# Altium PCB board_2.PcbDoc
Units mm, origin at the board's own origin, x right, y up, seen from the top; angles counter-clockwise.
Board outline 90 x 50 mm, 4 copper layers (Top Layer, Signal Layer 1, Signal Layer 2, Bottom Layer), stack 0.778 mm thick; 158 components, 168 nets, 632 pads, 0 vias.
Unrouted connection lines stored in the file: 312.
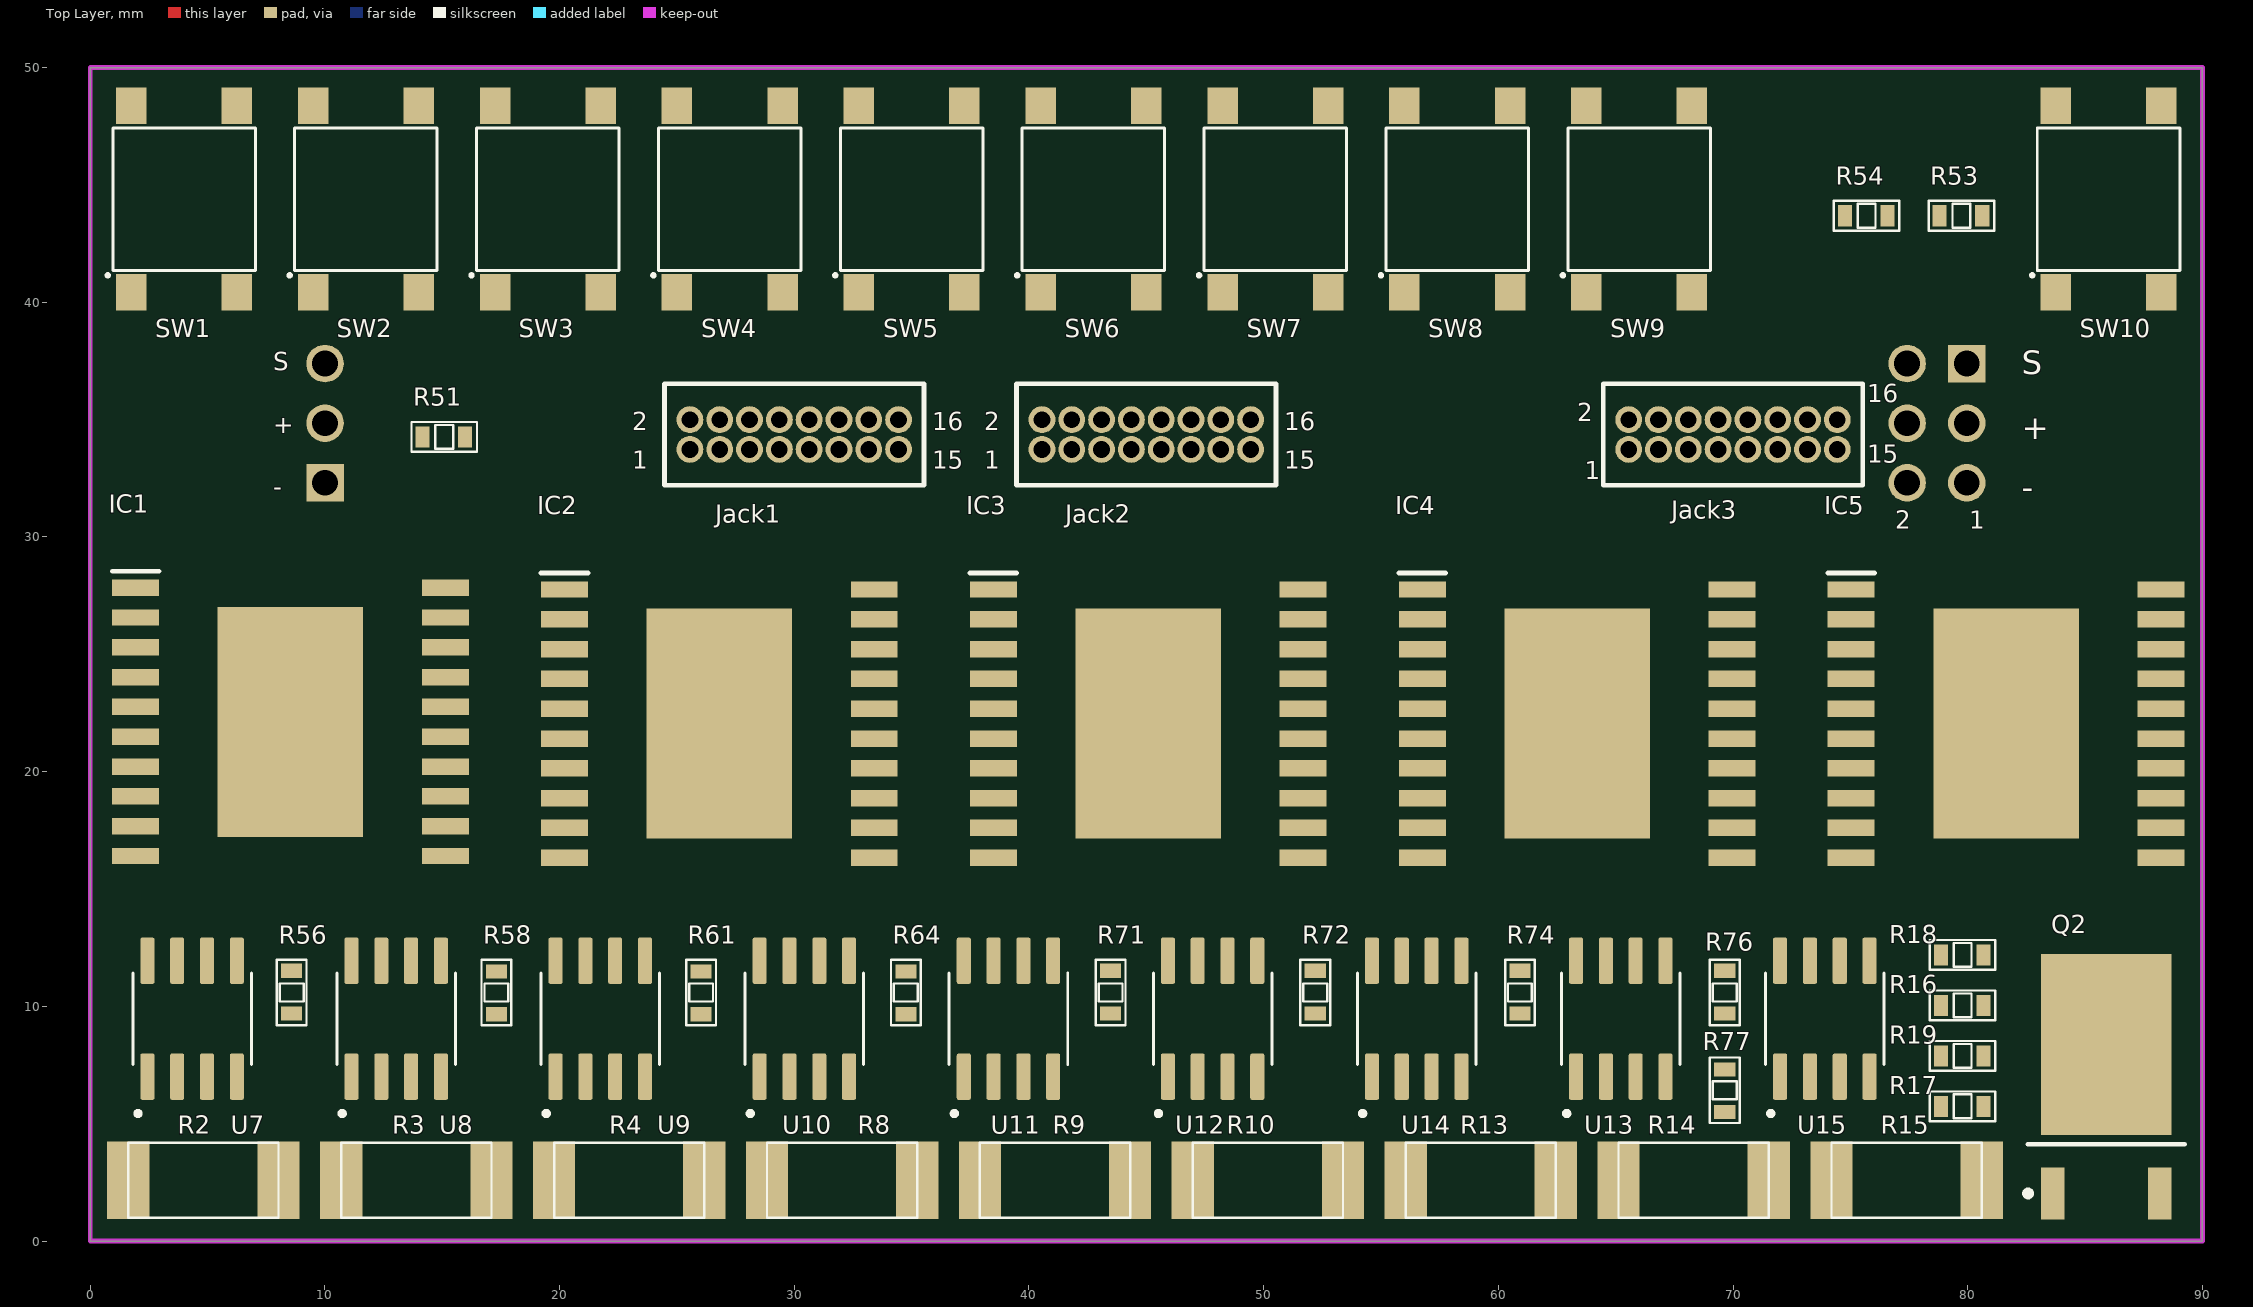
[diagram p0: Top Layer view]
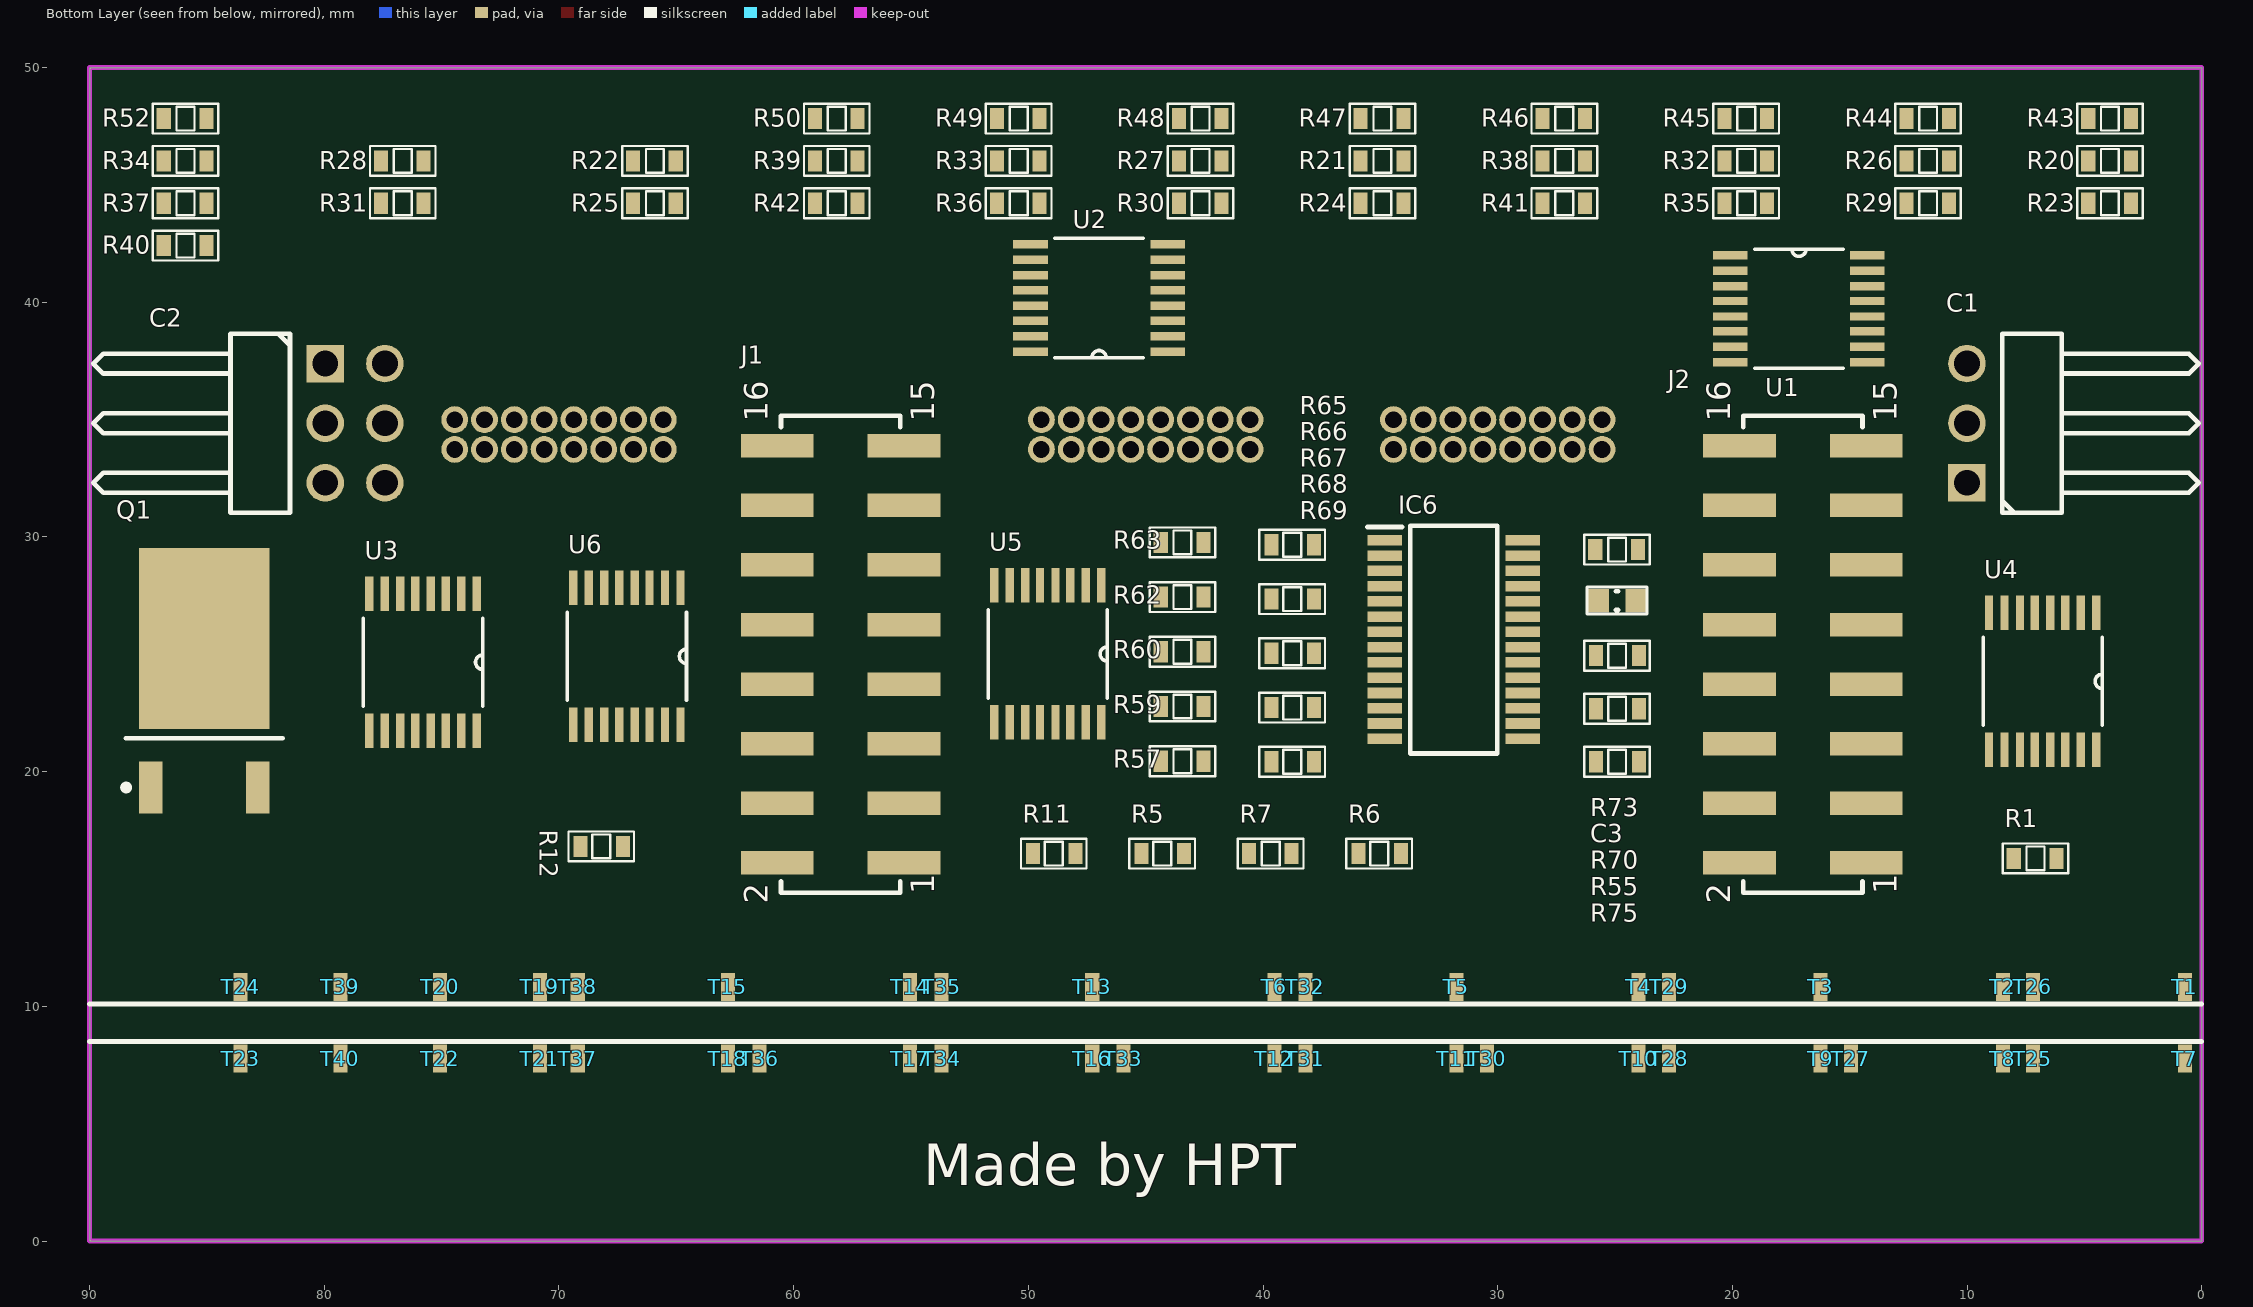
[diagram p1: Bottom Layer view, seen from below]
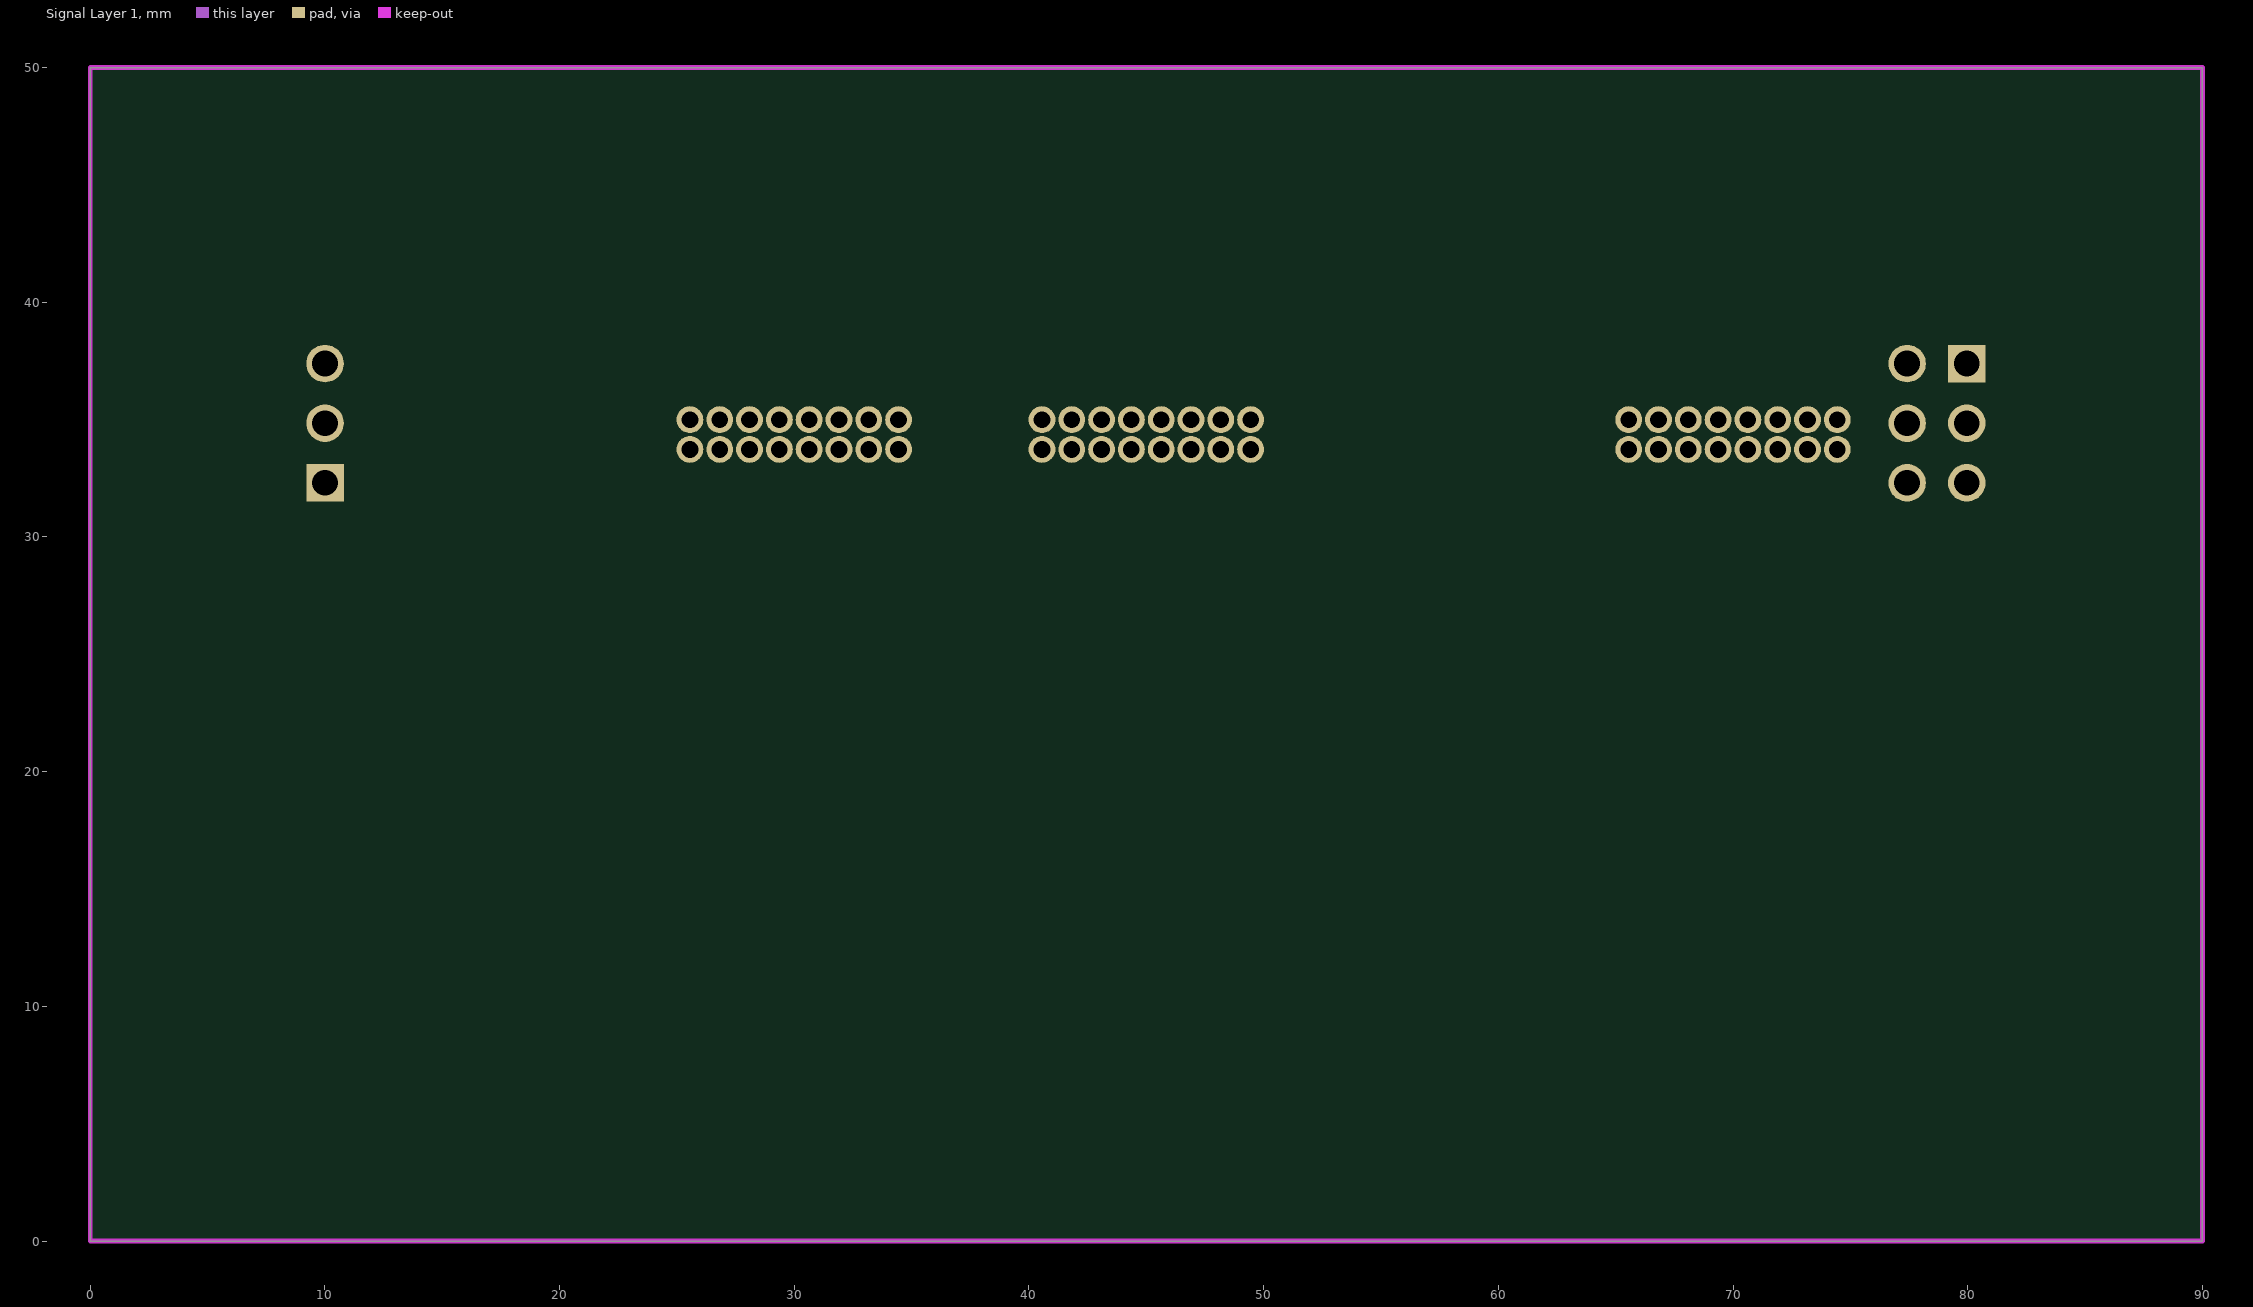
[diagram p2: Signal Layer 1]
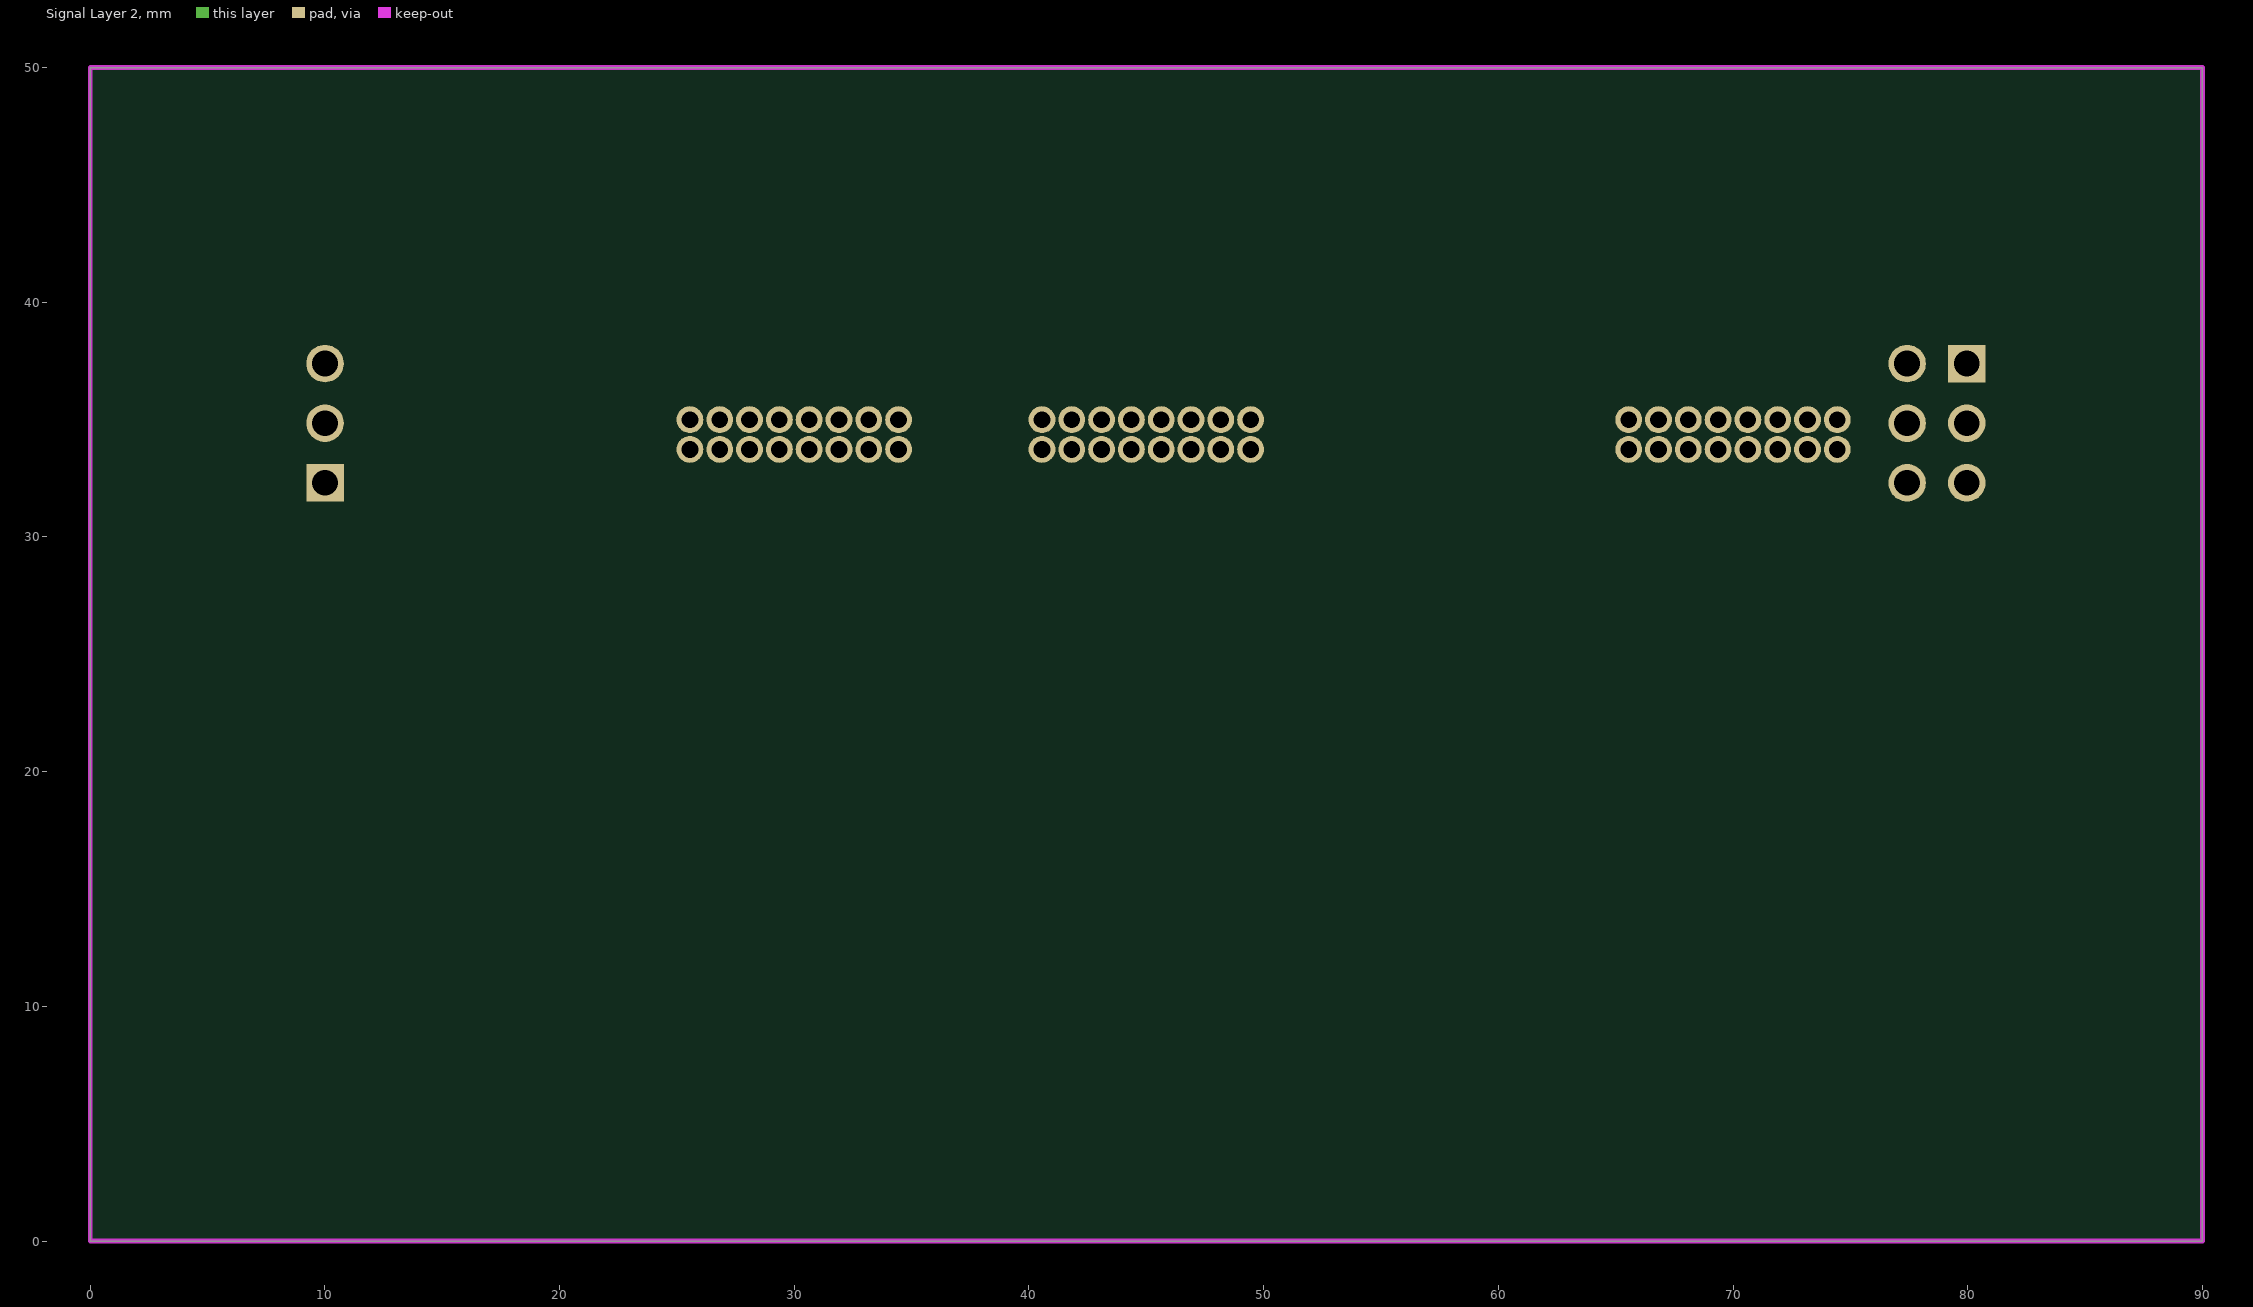
[diagram p3: Signal Layer 2]

## Layer stack, top to bottom
Top Solder: solder mask 0.0102, Solder Resist, Dk 3.5
Top Layer: signal copper 0.0356
Dielectric 1: core 0.254, FR-4, Dk 4.2
Signal Layer 1: signal copper 0.036
Dielectric 3: prepreg 0.127, Dk 4.2
Signal Layer 2: signal copper 0.036
Dielectric 2: core 0.254, Dk 4.2
Bottom Layer: signal copper 0.0356
Bottom Solder: solder mask 0.0102, Solder Resist, Dk 3.5

## Board outline
0,0 90,0 90,50 0,50

## Design rules (kind name [scope] priority, off if disabled: settings)
Clearance [All] p1: gap=0.127
PlaneConnect [All] p1: planeconnectstyle=Direct reliefexpansion=0.508 reliefentries=4 reliefconductorwidth=0.254 reliefairgap=0.254
PolygonConnect [All] p1: connectstyle=Direct reliefconductorwidth=0.254 reliefentries=4 polygonreliefangle="90 Angle" airgapwidth=0.254
RoomDefinition servo [InComponentClass('servo')] p1: confinementstyle=ConfineIn formatcopy=TRUE lockcomponents=FALSE outline 111.76,-15.418 315.874,-15.418 315.874,-2.261 111.76,-2.261
RoomDefinition user [InComponentClass('user')] p2: confinementstyle=ConfineIn formatcopy=TRUE lockcomponents=FALSE outline 111.963,30.175 501.193,30.175 501.193,55.423 111.963,55.423
RoomDefinition ina219 [InComponentClass('ina219')] p3: confinementstyle=ConfineIn formatcopy=TRUE lockcomponents=FALSE outline 111.963,9.55 505.13,9.55 505.13,28.905 111.963,28.905
RoomDefinition 74hc595 [InComponentClass('74hc595')] p4: confinementstyle=ConfineIn formatcopy=TRUE lockcomponents=FALSE outline 111.963,0.254 163.678,0.254 163.678,8.28 111.963,8.28
RoutingVias [All] p1: holewidth=0.3 width=0.5 viastyle="Through Hole" minholewidth=0.3 minwidth=0.5 maxholewidth=0.711 maxwidth=1.27
SolderMaskExpansion [All] p1: expansion=0.102
Width [All] p1: maxlimit=2.54 minlimit=0.203 preferedwidth=0.203
29 further rules are at their usual default settings.

## Classes and differential pairs
component class servo: C3 IC6 R55 R56 R57 R58 R59 R60 R61 R62 R63 R64 R65 R66 R67 R68 R69 R70 R71 R72 R73 R74 R75 R76 R77 T25 T26 T27 T28 T29 T30 T31 T32 T33 T34 T35 T36 T40
component class user: C1 C2 J1 J2 Jack1 Jack2 Jack3 R20 R21 R22 R23 R24 R25 R26 R27 R28 R29 R30 R31 R32 R33 R34 R35 R36 R37 R38 R39 R40 R41 R42 R43 R44 R45 R46 R47 R48 R49 R50 R51 R52 R53 R54 SW1 SW2 SW3 SW4 SW5 SW6 SW7 SW8 SW9 SW10 T23 T24
component class ina219: IC1 IC2 IC3 IC4 IC5 Q1 Q2 R1 R2 R3 R4 R5 R6 R7 R8 R9 R10 R11 R12 R13 R14 R15 R16 R17 R18 R19 T1 T2 T3 T4 T5 T6 T7 T8 T9 T10 T11 T12 T13 T14 T15 T16 T17 T18 T19 T20 T21 T22 U7 U8 U9 U10 U11 U12 U13 U14 U15
component class 74hc595: U1 U2 U3 U4 U5 U6 U27

## Components (designator, comment, footprint, x,y, rotation, side; value= is the part's Value field where it differs from the comment)
C1 "JP3" JP3-D1C 7.468,38.659 r90 bottom
C2 "JP3x2" JP3-D2C 78.689,34.849 r270 bottom
C3 "0.1uF" CN-SMD-0603 24.917,27.293 r0 bottom
IC1 "L298P" SOIC127P1420X360-21N 8.534,22.123 r0 top
IC2 "L298P" SOIC127P1420X360-21N 26.81,22.047 r0 top
IC3 "L298P" SOIC127P1420X360-21N 45.085,22.047 r0 top
IC4 "L298P" SOIC127P1420X360-21N 63.36,22.047 r0 top
IC5 "L298P" SOIC127P1420X360-21N 81.636,22.047 r0 top
IC6 "PCA9685PW,112" SOP65P640X110-28N 31.877,25.629 r180 bottom
J1 "2.54 mm_SMD_Vertical_16 pin" 61031621121 58,25 r90 bottom
J2 "2.54 mm_SMD_Vertical_16 pin" 61031621121 17,25 r90 bottom
Jack1 "SAMTEC-FTS-108-04-X-D" SAMTEC-FTS-108-04-X-D 30,34.366 r0 top
Jack2 "SAMTEC-FTS-108-04-X-D" SAMTEC-FTS-108-04-X-D 45,34.366 r0 top
Jack3 "SAMTEC-FTS-108-04-X-D" SAMTEC-FTS-108-04-X-D 70,34.366 r0 top
Q1 "IRFR3708" TO-252AA_M 85.115,23.876 r90 bottom
Q2 "IRFR3708" TO-252AA_M 85.903,6.579 r90 top
R1 "Res" RES-SMD-0603 7.087,16.307 r0 bottom
R2 "0.01R" RES-SMD-2512 4.826,2.464 r0 top
R3 "0.01R" RES-SMD-2512 13.897,2.464 r0 top
R4 "0.01R" RES-SMD-2512 22.968,2.718 r180 top
R5 "Res" RES-SMD-0603 44.298,16.51 r180 bottom
R6 "Res" RES-SMD-0603 35.052,16.51 r180 bottom
R7 "Res" RES-SMD-0603 39.675,16.51 r0 bottom
R8 "0.01R" RES-SMD-2512 32.039,2.464 r0 top
R9 "0.01R" RES-SMD-2512 41.11,2.464 r0 top
R10 "0.01R" RES-SMD-2512 50.181,2.464 r0 top
R11 "Res" RES-SMD-0603 48.92,16.51 r180 bottom
R12 "Res" RES-SMD-0603 68.199,16.815 r180 bottom
R13 "0.01R" RES-SMD-2512 59.252,2.464 r0 top
R14 "0.01R" RES-SMD-2512 68.323,2.464 r0 top
R15 "0.01R" RES-SMD-2512 77.394,2.464 r0 top
R16 "1k" RES-SMD-0603 79.781,10.041 r180 top
R17 "1K" RES-SMD-0603 79.781,5.74 r180 top
R18 "10K" RES-SMD-0603 79.781,12.192 r180 top
R19 "10K" RES-SMD-0603 79.781,7.891 r180 top
R20 "1K" RES-SMD-0603 3.914,46.025 r0 bottom
R21 "1K" RES-SMD-0603 34.914,46.025 r0 bottom
R22 "1K" RES-SMD-0603 65.914,46.025 r0 bottom
R23 "1K" RES-SMD-0603 3.914,44.221 r0 bottom
R24 "1K" RES-SMD-0603 34.914,44.221 r0 bottom
R25 "1K" RES-SMD-0603 65.914,44.221 r0 bottom
R26 "1K" RES-SMD-0603 11.664,46.025 r0 bottom
R27 "1K" RES-SMD-0603 42.664,46.025 r0 bottom
R28 "1K" RES-SMD-0603 76.657,46.025 r0 bottom
R29 "1K" RES-SMD-0603 11.664,44.221 r0 bottom
R30 "1K" RES-SMD-0603 42.664,44.221 r0 bottom
R31 "1K" RES-SMD-0603 76.657,44.221 r0 bottom
R32 "1K" RES-SMD-0603 19.414,46.025 r0 bottom
R33 "1K" RES-SMD-0603 50.414,46.025 r0 bottom
R34 "1K" RES-SMD-0603 85.914,46.025 r0 bottom
R35 "1K" RES-SMD-0603 19.414,44.221 r0 bottom
R36 "1K" RES-SMD-0603 50.414,44.221 r0 bottom
R37 "1K" RES-SMD-0603 85.914,44.221 r0 bottom
R38 "1K" RES-SMD-0603 27.164,46.025 r0 bottom
R39 "1K" RES-SMD-0603 58.164,46.025 r0 bottom
R40 "1K" RES-SMD-0603 85.914,42.418 r0 bottom
R41 "1K" RES-SMD-0603 27.164,44.221 r0 bottom
R42 "1K" RES-SMD-0603 58.164,44.221 r0 bottom
R43 "10K" RES-SMD-0603 3.914,47.828 r0 bottom
R44 "10K" RES-SMD-0603 11.664,47.828 r0 bottom
R45 "10K" RES-SMD-0603 19.414,47.828 r0 bottom
R46 "10K" RES-SMD-0603 27.164,47.828 r0 bottom
R47 "10K" RES-SMD-0603 34.914,47.828 r0 bottom
R48 "10K" RES-SMD-0603 42.664,47.828 r0 bottom
R49 "10K" RES-SMD-0603 50.414,47.828 r0 bottom
R50 "10K" RES-SMD-0603 58.164,47.828 r0 bottom
R51 "0R" RES-SMD-0603 15.088,34.265 r180 top
R52 "10K" RES-SMD-0603 85.914,47.828 r0 bottom
R53 "0R" RES-SMD-0603 79.731,43.688 r180 top
R54 "0R" RES-SMD-0603 75.692,43.688 r180 top
R55 "220" RES-SMD-0603 24.917,22.682 r180 bottom
R56 "220" RES-SMD-0603 8.585,10.592 r90 top
R57 "220" RES-SMD-0603 43.434,20.447 r0 bottom
R58 "220" RES-SMD-0603 17.308,10.592 r270 top
R59 "220" RES-SMD-0603 43.434,22.777 r0 bottom
R60 "220" RES-SMD-0603 43.434,25.108 r0 bottom
R61 "220" RES-SMD-0603 26.031,10.592 r270 top
R62 "220" RES-SMD-0603 43.434,27.438 r0 bottom
R63 "220" RES-SMD-0603 43.434,29.769 r0 bottom
R64 "220" RES-SMD-0603 34.754,10.592 r270 top
R65 "220" RES-SMD-0603 38.76,29.667 r180 bottom
R66 "220" RES-SMD-0603 38.76,27.356 r180 bottom
R67 "220" RES-SMD-0603 38.76,25.044 r180 bottom
R68 "220" RES-SMD-0603 38.76,22.733 r180 bottom
R69 "220" RES-SMD-0603 38.76,20.422 r180 bottom
R70 "220" RES-SMD-0603 24.917,24.943 r180 bottom
R71 "220" RES-SMD-0603 43.478,10.592 r90 top
R72 "220" RES-SMD-0603 52.201,10.592 r90 top
R73 "0R" RES-SMD-0603 24.918,29.464 r0 bottom
R74 "220" RES-SMD-0603 60.924,10.592 r90 top
R75 "10K" RES-SMD-0603 24.917,20.422 r180 bottom
R76 "220" RES-SMD-0603 69.647,10.592 r90 top
R77 "220" RES-SMD-0603 69.647,6.426 r270 top
SW1 "M1" SW2-SMD 4,44.399 r90 top
SW2 "M2" SW2-SMD 11.75,44.399 r90 top
SW3 "M3" SW2-SMD 19.5,44.399 r90 top
SW4 "M4" SW2-SMD 27.25,44.399 r90 top
SW5 "M5" SW2-SMD 35,44.399 r90 top
SW6 "M6" SW2-SMD 42.75,44.399 r90 top
SW7 "M7" SW2-SMD 50.5,44.399 r90 top
SW8 "M8" SW2-SMD 58.25,44.399 r90 top
SW9 "M9" SW2-SMD 66,44.399 r90 top
SW10 "M10" SW2-SMD 86,44.399 r90 top
T1 "Pad" PCBComponent_1 0.72,10.827 r180 top
T2 "Pad" PCBComponent_1 8.48,10.827 r0 top
T3 "Pad" PCBComponent_1 16.24,10.827 r0 top
T4 "Pad" PCBComponent_1 24,10.827 r0 top
T5 "Pad" PCBComponent_1 31.76,10.827 r0 top
T6 "Pad" PCBComponent_1 39.52,10.827 r0 top
T7 "Pad" PCBComponent_1 0.72,7.773 r0 top
T8 "Pad" PCBComponent_1 8.48,7.773 r0 top
T9 "Pad" PCBComponent_1 16.24,7.773 r0 top
T10 "Pad" PCBComponent_1 24,7.773 r180 top
T11 "Pad" PCBComponent_1 31.76,7.773 r0 top
T12 "Pad" PCBComponent_1 39.52,7.773 r180 top
T13 "Pad" PCBComponent_1 47.28,10.827 r180 top
T14 "Pad" PCBComponent_1 55.04,10.827 r180 top
T15 "Pad" PCBComponent_1 62.8,10.827 r180 top locked
T16 "Pad" PCBComponent_1 47.28,7.773 r180 top
T17 "Pad" PCBComponent_1 55.04,7.773 r180 top
T18 "Pad" PCBComponent_1 62.8,7.773 r180 top
T19 "Pad" PCBComponent_1 70.815,10.827 r180 top
T20 "Pad" PCBComponent_1 75.065,10.827 r180 top
T21 "Pad" PCBComponent_1 70.815,7.773 r180 top
T22 "Pad" PCBComponent_1 75.065,7.773 r180 top
T23 "Pad" PCBComponent_1 83.566,7.773 r180 top
T24 "Pad" PCBComponent_1 83.566,10.827 r180 top
T25 "Pad" PCBComponent_1 7.2,7.773 r180 top
T26 "Pad" PCBComponent_1 7.2,10.827 r180 top
T27 "Pad" PCBComponent_1 14.95,7.773 r180 top
T28 "Pad" PCBComponent_1 22.7,7.773 r180 top
T29 "Pad" PCBComponent_1 22.7,10.827 r180 top
T30 "Pad" PCBComponent_1 30.45,7.773 r180 top
T31 "Pad" PCBComponent_1 38.2,7.773 r180 top
T32 "Pad" PCBComponent_1 38.2,10.827 r180 top
T33 "Pad" PCBComponent_1 45.95,7.773 r180 top
T34 "Pad" PCBComponent_1 53.7,7.773 r180 top
T35 "Pad" PCBComponent_1 53.7,10.827 r180 top
T36 "Pad" PCBComponent_1 61.45,7.773 r180 top
T37 "Pad" PCBComponent_1 69.2,7.773 r180 top
T38 "Pad" PCBComponent_1 69.2,10.827 r180 top
T39 "Pad" PCBComponent_1 79.316,10.827 r180 top
T40 "Pad" PCBComponent_1 79.316,7.773 r180 top
U1 "74HC595PW,112" SOP65P640X110-16N 17.17,39.726 r180 bottom
U2 "74HC595PW,112" SOP65P640X110-16N 46.99,40.183 r0 bottom
U3 "74HC595PW,112" SOP65P640X110-16N 75.794,24.663 r270 bottom
U4 "74HC595PW,112" SOP65P640X110-16N 6.782,23.851 r270 bottom
U5 "74HC595PW,112" SOP65P640X110-16N 49.174,25.019 r270 bottom
U6 "74HC595PW,112" SOP65P640X110-16N 67.107,24.917 r270 bottom
U7 "INA219AID" SOIC127P599X175-8N 4.343,9.474 r90 top
U8 "INA219AID" SOIC127P599X175-8N 13.04,9.474 r90 top
U9 "INA219AID" SOIC127P599X175-8N 21.736,9.474 r90 top
U10 "INA219AID" SOIC127P599X175-8N 30.432,9.474 r90 top
U11 "INA219AID" SOIC127P599X175-8N 39.129,9.474 r90 top
U12 "INA219AID" SOIC127P599X175-8N 47.825,9.474 r90 top
U13 "INA219AID" SOIC127P599X175-8N 56.521,9.474 r90 top
U14 "INA219AID" SOIC127P599X175-8N 65.218,9.474 r90 top
U15 "INA219AID" SOIC127P599X175-8N 73.914,9.474 r90 top

## Footprints (in the part's own frame and the unit in brackets; to place one, negate y for a bottom-side part, rotate by r counter-clockwise, add the part's x,y. Pads: shape width x height; smd on the part's side, far side on the other; paste and mask are expansions set on the pad)
61031621121 [mm] "Pin Header, pitch 2.54 mm, SMD, Vertical, dual row, 16p"
  rect 1x3.1 smd: 1(-8.89,-2.7) 2(-8.89,2.7) 3(-6.35,-2.7) 4(-6.35,2.7) 5(-3.81,-2.7) 6(-3.81,2.7) 7(-1.27,-2.7) 8(-1.27,2.7) 9(1.27,-2.7) 10(1.27,2.7) 11(3.81,-2.7) 12(3.81,2.7) 13(6.35,-2.7) 14(6.35,2.7) 15(8.89,-2.7) 16(8.89,2.7)
  silkscreen extent -10.16,-2.54 10.16,2.54, body extent -10.16,-3.75 10.16,3.75, height 9.62
CN-SMD-0603 [mm]
  rect 0.9x1 smd: 1(-0.8,0) 2(0.8,0)
  silkscreen extent -1.27,-0.58 1.27,0.58, body extent -0.8,-0.4 0.8,0.4, height 0.3
JP3-D1C [mm] "3 pins, 1 row, right angled, gold plating"
  rect 1.6x1.6 hole 1.1: 1(-6.35,2.54)
  round 1.6 hole 1.1: 2(-3.81,2.54) 3(-1.27,2.54)
  silkscreen extent -7.62,-7.34 0,1.04, body extent -7.62,-7.52 0,2.84, height 2.55
JP3-D2C [mm] "06 pins, dual row, right angled, gold plating"
  rect 1.6x1.6 hole 1.1: 1(-2.54,-1.27)
  round 1.6 hole 1.1: 2(0,-1.27) 3(2.54,-1.27) 4(2.54,1.27) 5(0,1.27) 6(-2.54,1.27)
  silkscreen extent -3.81,-11.15 3.81,-2.77, body extent -3.81,-11.25 3.81,1.65, height 5.09
PCBComponent_1 [mm]
  rect 0.6x1.2 smd far side: 0(0,0)
RES-SMD-0603 [mm]
  rect 0.6x0.9 smd: 1(-0.889,0) 2(0.927,0)
  silkscreen extent -1.4,-0.64 1.4,0.64, body extent -0.8,-0.4 0.8,0.4, height 0.43
RES-SMD-2512 [mm] "Chip Capacitor, Body 3.2x2.5mm, IPC Medium Density"
  rect 1.8x3.3 smd: 1(-3.2,0.127) 2(3.2,0.127)
  silkscreen extent -3.2,-1.47 3.2,1.73, body extent -3.2,-1.47 3.2,1.73, height 0.6
SAMTEC-FTS-108-04-X-D [mil]
  round 45 hole 27.95 mask+0: 1(-175,-25) 2(-175,25) 3(-125,-25) 4(-125,25) 5(-75,-25) 6(-75,25) 7(-25,-25) 8(-25,25) 9(25,-25) 10(25,25) 11(75,-25) 12(75,25) 13(125,-25) 14(125,25) 15(175,-25) 16(175,25)
  silkscreen extent -218,-85 218,85, body extent -200,-67 200,68, height 184
SOIC127P599X175-8N [mm]
  rrect25% 1.97x0.6 smd: 1(-2.47,1.905) 2(-2.47,0.635) 3(-2.47,-0.635) 4(-2.47,-1.905) 5(2.47,-1.905) 6(2.47,-0.635) 7(2.47,0.635) 8(2.47,1.905)
  silkscreen extent -4.14,-2.52 1.95,2.52, body extent -3,-2.49 3,2.41, height 1.75
SOIC127P1420X360-21N [mm]
  rect 2x0.7 smd: 1(-6.6,5.715) 2(-6.6,4.445) 3(-6.6,3.175) 4(-6.6,1.905) 5(-6.6,0.635) 6(-6.6,-0.635) 7(-6.6,-1.905) 8(-6.6,-3.175) 9(-6.6,-4.445) 10(-6.6,-5.715) 11(6.6,-5.715) 12(6.6,-4.445) 13(6.6,-3.175) 14(6.6,-1.905) 15(6.6,-0.635) 16(6.6,0.635) 17(6.6,1.905) 18(6.6,3.175) 19(6.6,4.445) 20(6.6,5.715)
  rect 6.2x9.8 smd: 21(0,0)
  silkscreen extent -7.6,6.42 -5.6,6.42, body extent -7.1,-7.95 7.1,7.95, height 3.6
SOP65P640X110-16N [mil]
  rect 58x14 smd: 1(-115,90) 2(-115,64) 3(-115,38) 4(-115,13) 5(-115,-13) 6(-115,-38) 7(-115,-64) 8(-115,-90) 9(115,-90) 10(115,-64) 11(115,-38) 12(115,-13) 13(115,13) 14(115,38) 15(115,64) 16(115,90)
  silkscreen extent -74,-100 74,100, body extent -126,-98 126,98, height 43
SOP65P640X110-28N [mm]
  rect 1.475x0.45 smd: 1(-2.938,4.225) 2(-2.938,3.575) 3(-2.938,2.925) 4(-2.938,2.275) 5(-2.938,1.625) 6(-2.938,0.975) 7(-2.938,0.325) 8(-2.938,-0.325) 9(-2.938,-0.975) 10(-2.938,-1.625) 11(-2.938,-2.275) 12(-2.938,-2.925) 13(-2.938,-3.575) 14(-2.938,-4.225) 15(2.938,-4.225) 16(2.938,-3.575) 17(2.938,-2.925) 18(2.938,-2.275) 19(2.938,-1.625) 20(2.938,-0.975) 21(2.938,-0.325) 22(2.938,0.325) 23(2.938,0.975) 24(2.938,1.625) 25(2.938,2.275) 26(2.938,2.925) 27(2.938,3.575) 28(2.938,4.225)
  silkscreen extent -3.67,-4.85 1.85,4.85, body extent -3.2,-4.85 3.2,4.85, height 1.1
SW2-SMD [mm] "6*6mm vertical type, SMD, height 5.0mm, black actuator, 160gf, T&R"
  rect 1.55x1.3 smd: 1(-3.975,2.25) 2(-3.975,-2.25) 3(3.975,-2.25) 4(3.975,2.25)
  silkscreen extent -3.29,-3.04 3.04,3.29, body extent -4.5,-3.1 4.5,3.1, height 4.99
TO-252AA_M [mm] "D-PAK, 4-Leads, Body 6.1x6.5mm, Pitch 2.28mm, Lead Span 9.9mm, IPC Low Density"
  rect 2.2x1 smd: 1(-4.55,2.28) 3(-4.55,-2.28)
  rect 7.7x5.55 smd: 4(1.8,0)
  silkscreen extent -4.67,-3.35 -2.45,3.46, body extent -2.2,-3.37 4.15,3.37, height 2.38

## Part data
C1: "WR-PHD 2.54 mm Angled Socket Header"
C2: "WR-PHD 2.54 mm Dual Socket Header"
C3: library part CN, "Tu gom"
IC1 IC2 IC3 IC4 IC5 IC6: "Integrated Circuit"
J1 J2: library part 61031621121, "Pin Header WR-PHD, pitch 2.54 mm, SMD, Vertical, dual row, 16 pin"
Q1 Q2: library part IRFR3910, "HEXFET Power MOSFET"
R1 R2 R3 R4 R5 R6 R7 R8 R9 R10 R11 R12 R13 R14 R15 R16 R17 R18 R19 R20 R21 R22 R23 R24 R25 R26 R27 R28 R29 R30 R31 R32 R33 R34 R35 R36 R37 R38 R39 R40 R41 R42 R43 R44 R45 R46 R47 R48 R49 R50 R51 R52 R53 R54 R55 R56 R57 R58 R59 R60 R61 R62 R63 R64 R65 R66 R67 R68 R69 R70 R71 R72 R73 R74 R75 R76 R77: library part Res-SMD, "Resistor"
SW1 SW2 SW3 SW4 SW5 SW6 SW7 SW8 SW9 SW10: library part SW4, "Switch button 4 pin"
T1 T2 T3 T4 T5 T6 T7 T8 T9 T10 T11 T12 T13 T14 T15 T16 T17 T18 T19 T20 T21 T22 T23 T24 T25 T26 T27 T28 T29 T30 T31 T32 T33 T34 T35 T36 T37 T38 T39 T40: library part Component_1, "pad"
U1 U2 U3 U4 U5 U6: "Shift Shift Register 1 Element 8 Bit 16-TSSOP"
U7 U8 U9 U10 U11 U12 U13 U14 U15: "26V, 12-bit, i2c output current/voltage/power monitor 8-SOIC -40 to 125"

## Nets (pads, with @x,y where several pads share a name; then routed paths per layer and width w, separated by ;. In a path a pad name is that pad's centre, name@x,y a point inside that pad or via, vN(x,y) a via of type N, cw(c..) or ccw(c..) an arc to the next point about the centre after c; other vN are vias at no path point)
3V3: J1.6 Jack1.1 Jack1.5 Jack1.9 Jack1.13 Jack2.1 Jack2.5 Jack2.9 Jack2.13 Jack3.1 Jack3.5 Jack3.9 R1.1 R5.1 R6.1 R7.1 R11.1 R12.1 R43.1 R44.1 R45.1 R46.1 R47.1 R48.1 R49.1 R50.1 R52.1 U1.10 U1.16 U2.10 U2.16 U3.10 U3.16 U4.10 U4.16 U5.10 U5.16 U6.10 U6.16 U7.5 U8.5 U9.5 U10.5 U11.5 U12.5 U13.5 U14.5 U15.5
5V: IC1.8 IC1.12 IC1.14 IC2.8 IC2.12 IC2.14 IC3.8 IC3.12 IC3.14 IC4.8 IC4.12 IC4.14 IC5.8 IC5.12 J1.4 R51.1 R53.2 R54.1 R55.2 R57.2 R59.2 R60.2 R62.2 R63.2 R73.1
5V_1: J2.4 T26.0
5V_2: J2.2 T29.0
5V_3: J1.1 T32.0
5V_4: J1.3 T35.0
5V_5: J1.16 T38.0 T40.0
12V: IC1.6 IC2.6 IC3.6 IC4.6 IC5.6 J1.2 T19.0 T20.0 T23.0
A0: IC6.1 R63.1 R65.1
A1: IC6.2 R62.1 R66.1
A2: IC6.3 R60.1 R67.1
A3: IC6.4 R59.1 R68.1
A4: IC6.5 R57.1 R69.1
A5: IC6.24 R55.1 R70.1
BTN_M1: J2.11 R43.2 SW1.1 SW1.4
BTN_M2: J2.13 R44.2 SW2.1 SW2.4
BTN_M3: J2.15 R45.2 SW3.1 SW3.4
BTN_M4: J2.16 R46.2 SW4.1 SW4.4
BTN_M5: J2.14 R47.2 SW5.1 SW5.4
BTN_M6: J1.11 R48.2 SW6.1 SW6.4
BTN_M7: J1.13 R49.2 SW7.1 SW7.4
BTN_M8: J1.15 R50.2 SW8.1 SW8.4
BTN_M9: J1.14 SW9.1 SW9.4
DS: J2.12 U4.14
DS_2: J2.10 U1.14
GND: C1.1 C2.3 C2.4 C3.1 IC1.1 IC1.10 IC1.11 IC1.20 IC1.21 IC2.1 IC2.10 IC2.11 IC2.20 IC2.21 IC3.1 IC3.10 IC3.11 IC3.20 IC3.21 IC4.1 IC4.10 IC4.11 IC4.20 IC4.21 IC5.1 IC5.10 IC5.11 IC5.20 IC5.21 IC6.14 IC6.25 J2.1 J2.3 J2.5 Q1.3 Q2.3 R2.2 R3.2 R4.2 R8.2 R9.2 R10.2 R13.2 R14.2 R15.2 R18.2 R19.2 R65.2 R66.2 R67.2 R68.2 R69.2 R70.2 R75.2 SW1.2 SW1.3 SW2.2 SW2.3 SW3.2 SW3.3 SW4.2 SW4.3 SW5.2 SW5.3 SW6.2 SW6.3 SW7.2 SW7.3 SW8.2 SW8.3 SW9.2 SW9.3 SW10.2 SW10.3 T24.0 T39.0 U1.8 U1.13 U2.8 U2.13 U3.8 U3.13 U4.8 U4.13 U5.8 U5.13 U6.8 U6.13 U7.1 U7.2 U7.6 U7.7 U8.1 U8.6 U8.7 U9.1 U9.6 U9.7 U10.1 U10.6 U10.7 U11.2 U11.6 U11.7 U12.6 U12.7 U13.6 U13.7 U14.6 U14.7 U15.2 U15.6 U15.7
IN_LED_1: C2.1 J1.8
IN_LED_2: C2.6 J1.10
L1DOWN: IC1.9 U4.15
L1UP: IC1.7 U4.1
L2DOWN: IC1.15 U4.2
L2UP: IC1.13 U4.3
L3DOWN: IC2.9 U4.4
L3UP: IC2.7 U4.5
L4DOWN: IC2.15 U4.6
L4UP: IC2.13 U4.7
L5DOWN: IC3.9 U5.15
L5UP: IC3.7 U5.1
L6DOWN: IC3.15 U5.2
L6UP: IC3.13 U5.3
L7DOWN: IC4.9 U5.4
L7UP: IC4.7 U5.5
L8DOWN: IC4.15 U5.6
L8UP: IC4.13 U5.7
L9DOWN: IC5.9 U6.15
L9UP: IC5.7 U6.1
L10DOWN: U6.2
L10UP: U6.3
LED_B: R40.2 U3.6
LED_G: R37.2 U3.5
LED_R: R34.2 U3.4
M1_OFF: R20.2 U1.15
M1_ON: R23.2 U1.1
M2_OFF: R26.2 U1.2
M2_ON: R29.2 U1.3
M3_OFF: R32.2 U1.4
M3_ON: R35.2 U1.5
M4_OFF: R38.2 U1.6
M4_ON: R41.2 U1.7
M5_OFF: R21.2 U2.7
M5_ON: R24.2 U2.6
M6_OFF: R27.2 U2.5
M6_ON: R30.2 U2.4
M7_OFF: R33.2 U2.3
M7_ON: R36.2 U2.2
M8_OFF: R39.2 U2.1
M8_ON: R42.2 U2.15
M9_OFF: R22.2 U3.1
M9_ON: R25.2 U3.15
M10_OFF: R28.2 U3.3
M10_ON: R31.2 U3.2
MODE_RUN: C1.3 J2.6
MODE_SETUP: J1.12 R52.2 SW10.1 SW10.4
MOTOR1: IC1.2 R2.1 U7.8
MOTOR2: IC1.19 R3.1 U8.8
MOTOR3: IC2.2 R4.1 U9.8
MOTOR4: IC2.19 R8.1 U10.8
MOTOR5: IC3.2 R9.1 U11.8
MOTOR6: IC3.19 R10.1 U12.8
MOTOR7: IC4.2 R13.1 U13.8
MOTOR8: IC4.19 R14.1 U14.8
MOTOR9: IC5.2 R15.1 U15.8
NetC1_2: C1.2 R51.2
NetC2_2: C2.2 R53.1
NetC2_5: C2.5 R54.2
NetC3_2: C3.2 IC6.28 R73.2
NetIC1_4: IC1.4 T1.0
NetIC1_5: IC1.5 T7.0
NetIC1_16: IC1.16 T8.0
NetIC1_17: IC1.17 T2.0
NetIC2_4: IC2.4 T3.0
NetIC2_5: IC2.5 T9.0
NetIC2_16: IC2.16 T10.0
NetIC2_17: IC2.17 T4.0
NetIC3_4: IC3.4 T5.0
NetIC3_5: IC3.5 T11.0
NetIC3_16: IC3.16 T12.0
NetIC3_17: IC3.17 T6.0
NetIC4_4: IC4.4 T13.0
NetIC4_5: IC4.5 T16.0
NetIC4_16: IC4.16 T17.0
NetIC4_17: IC4.17 T14.0
NetIC5_4: IC5.4 T15.0
NetIC5_5: IC5.5 T18.0
NetIC6_23: IC6.23 R75.1
NetJack1_2: Jack1.2 R20.1
NetJack1_4: Jack1.4 R23.1
NetJack1_6: Jack1.6 R26.1
NetJack1_8: Jack1.8 R29.1
NetJack1_10: Jack1.10 R32.1
NetJack1_12: Jack1.12 R35.1
NetJack1_14: Jack1.14 R38.1
NetJack1_16: Jack1.16 R41.1
NetJack2_2: Jack2.2 R21.1
NetJack2_4: Jack2.4 R24.1
NetJack2_6: Jack2.6 R27.1
NetJack2_8: Jack2.8 R30.1
NetJack2_10: Jack2.10 R33.1
NetJack2_12: Jack2.12 R36.1
NetJack2_14: Jack2.14 R39.1
NetJack2_16: Jack2.16 R42.1
NetJack3_2: Jack3.2 R22.1
NetJack3_4: Jack3.4 R25.1
NetJack3_6: Jack3.6 R28.1
NetJack3_8: Jack3.8 R31.1
NetJack3_10: Jack3.10 R34.1
NetJack3_11: Jack3.11 R40.1
NetJack3_12: Jack3.12 R37.1
NetQ1_1: Q1.1 R16.2
NetQ1_4: Q1.4 T21.0
NetQ2_1: Q2.1 R17.2
NetQ2_4: Q2.4 T22.0
NetR1_2: R1.2 U8.2
NetR5_2: R5.2 U12.2
NetR6_2: R6.2 U11.1
NetR7_2: R7.2 U12.1
NetR11_2: R11.2 U13.1
NetR12_2: R12.2 U14.1
NetR56_2: R56.2 T25.0
NetR58_2: R58.2 T27.0
NetR61_2: R61.2 T28.0
NetR64_2: R64.2 T30.0
NetR71_2: R71.2 T31.0
NetR72_2: R72.2 T33.0
NetR74_2: R74.2 T34.0
NetR76_2: R76.2 T36.0
NetR77_2: R77.2 T37.0
NetU1_9: U1.9 U2.14
NetU2_9: U2.9 U3.14
NetU4_9: U4.9 U5.14
NetU5_9: U5.9 U6.14
OUT_LED_1: R16.1 R18.1 U6.4
OUT_LED_2: R17.1 R19.1 U6.5
SCL: IC6.26 J2.7 U7.4 U8.4 U9.4 U10.2 U10.4 U11.4 U12.4 U13.4 U14.2 U14.4 U15.4
SDA: IC6.27 J2.9 U7.3 U8.3 U9.2 U9.3 U10.3 U11.3 U12.3 U13.2 U13.3 U14.3 U15.1 U15.3
SERVO_1: IC6.6 R56.1
SERVO_2: IC6.7 R58.1
SERVO_3: IC6.8 R61.1
SERVO_4: IC6.9 R64.1
SERVO_5: IC6.10 R71.1
SERVO_6: IC6.11 R72.1
SERVO_7: IC6.12 R74.1
SERVO_8: IC6.13 R76.1
SERVO_9: IC6.15 R77.1
SH_CP: J1.5 U4.11 U5.11 U6.11
SH_CP_2: J1.9 U1.11 U2.11 U3.11
ST_CP: J2.8 U4.12 U5.12 U6.12
ST_CP_2: J1.7 U1.12 U2.12 U3.12
pads on no net: IC1.3 IC1.18 IC2.3 IC2.18 IC3.3 IC3.18 IC4.3 IC4.18 IC5.3 IC5.13 IC5.14 IC5.15 IC5.16 IC5.17 IC5.18 IC5.19 IC6.16 IC6.17 IC6.18 IC6.19 IC6.20 IC6.21 IC6.22 Jack1.3 Jack1.7 Jack1.11 Jack1.15 Jack2.3 Jack2.7 Jack2.11 Jack2.15 Jack3.3 Jack3.7 Jack3.13 Jack3.14 Jack3.15 Jack3.16 U3.7 U3.9 U6.6 U6.7 U6.9

## Polygon pours and split planes (outlines as drawn)
GND on Top Layer "Top Layer-No Net" (solid, remove dead copper, shelved, pour order 0): 0,50 89.941,50 89.941,0.059 90,0 0,0
GND on Bottom Layer "Top Layer-No Net" (solid, remove dead copper, shelved, pour order 2): 0,50 90,50 90,0 0,0
GND on Signal Layer 1 "Top Layer-No Net" (solid, remove dead copper, shelved, pour order 4): 0,50 0.038,49.962 90,49.962 90,0 0,0
3V3 on Signal Layer 2 "Top Layer-No Net" (solid, remove dead copper, shelved, pour order 6): 0,50 90,50 90,0 0.025,0

## Keep-outs
Keep-Out Layer:
  the board outline again, w0.203

## Silkscreen, mask and mechanical layers (free items; w line width, h text height)
Top Overlay:
  text "S" at 7.798,37.109 h0.76
  text "S" at 82.296,36.932 h1.02
  text "+" at 7.798,34.417 h0.76
  text "+" at 82.296,34.163 h1.02
  text "-" at 7.798,31.775 h0.76
  text "-" at 82.296,31.623 h1.02
  text "2" at 76.911,30.353 h0.76
  text "1" at 80.061,30.353 h0.76
  text "12V" at 93.828,-0.635 h0.76
  text "GND" at 93.802,-7.671 h0.76
Bottom Overlay:
  lines w0.203: 0,8.5 90,8.5 ; 0,10.1 90,10.1
  text "Made by HPT" at 54.48,2.388 h1.78

## Text inside footprints (layer, text, board x,y; h text height)
J1: Bottom Overlay "2" at 61.1,14.38 h1 r270; Bottom Overlay "1" at 54,14.78 h1 r270; Bottom Overlay "15" at 54,34.92 h1 r270; Bottom Overlay "16" at 61.1,34.92 h1 r270
J2: Bottom Overlay "2" at 20.1,14.38 h1 r270; Bottom Overlay "1" at 13,14.78 h1 r270; Bottom Overlay "15" at 13,34.92 h1 r270; Bottom Overlay "16" at 20.1,34.92 h1 r270
Jack1: Top Overlay "1" at 23.1,32.918 h0.76; Top Overlay "2" at 23.1,34.544 h0.76; Top Overlay "15" at 35.871,32.918 h0.76; Top Overlay "16" at 35.871,34.544 h0.76; Mechanical 13 "1" at 23.1,32.918 h0.76; Mechanical 13 "2" at 23.1,34.544 h0.76; Mechanical 13 "15" at 35.871,32.918 h0.76; Mechanical 13 "16" at 35.871,34.544 h0.76
Jack2: Top Overlay "1" at 38.1,32.918 h0.76; Top Overlay "2" at 38.1,34.544 h0.76; Top Overlay "15" at 50.871,32.918 h0.76; Top Overlay "16" at 50.871,34.544 h0.76; Mechanical 13 "1" at 38.1,32.918 h0.76; Mechanical 13 "2" at 38.1,34.544 h0.76; Mechanical 13 "15" at 50.871,32.918 h0.76; Mechanical 13 "16" at 50.871,34.544 h0.76
Jack3: Top Overlay "1" at 63.673,32.461 h0.76; Top Overlay "2" at 63.368,34.925 h0.76; Top Overlay "15" at 75.717,33.172 h0.76; Top Overlay "16" at 75.717,35.738 h0.76; Mechanical 13 "1" at 63.673,32.461 h0.76; Mechanical 13 "2" at 63.368,34.925 h0.76; Mechanical 13 "15" at 75.871,32.918 h0.76; Mechanical 13 "16" at 75.871,34.544 h0.76